# Altium PCB Optic_sensor_quad.PcbDoc
Units mm, origin at the board's own origin, x right, y up, seen from the top; angles counter-clockwise.
Board outline 50 x 12 mm, 2 copper layers (Top Layer, Bottom Layer), stack 0.871 mm thick; 29 components, 16 nets, 82 pads, 26 vias.
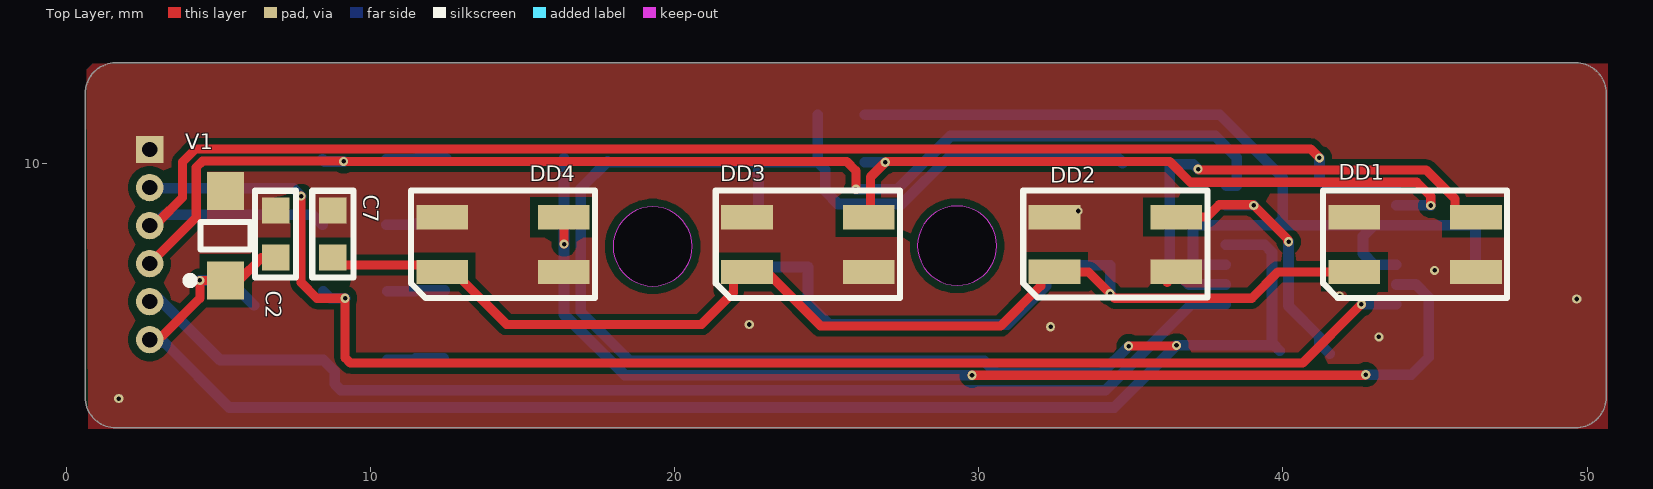
[diagram p0: Top Layer view]
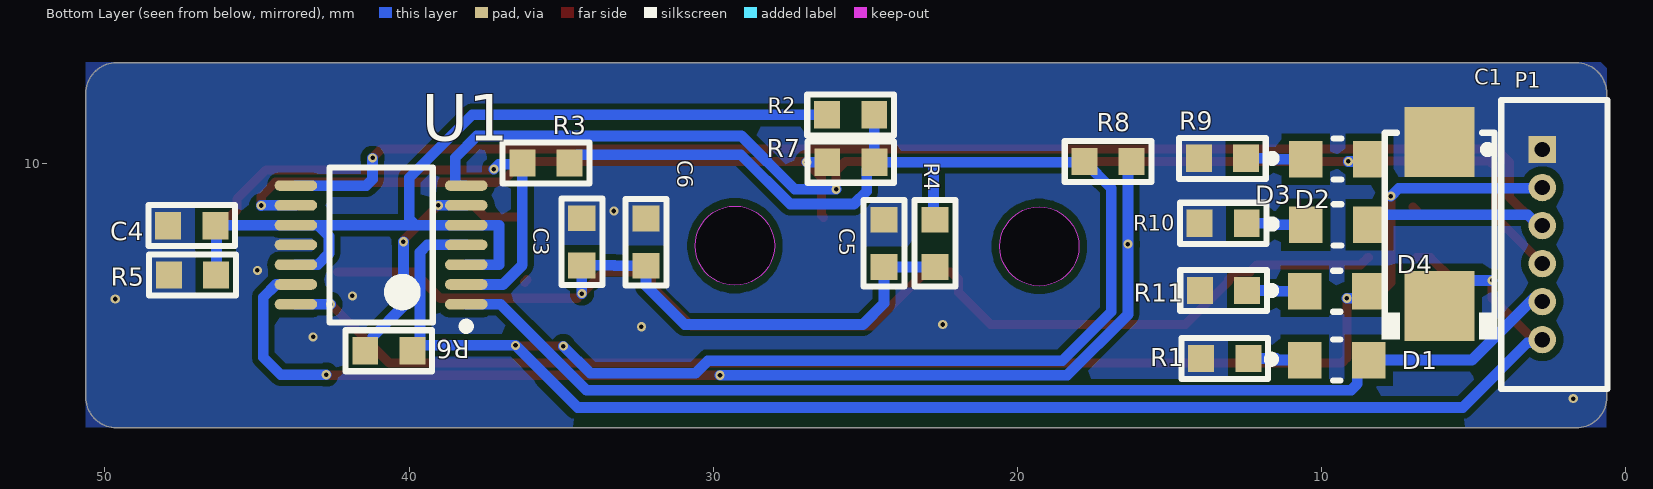
[diagram p1: Bottom Layer view, seen from below]
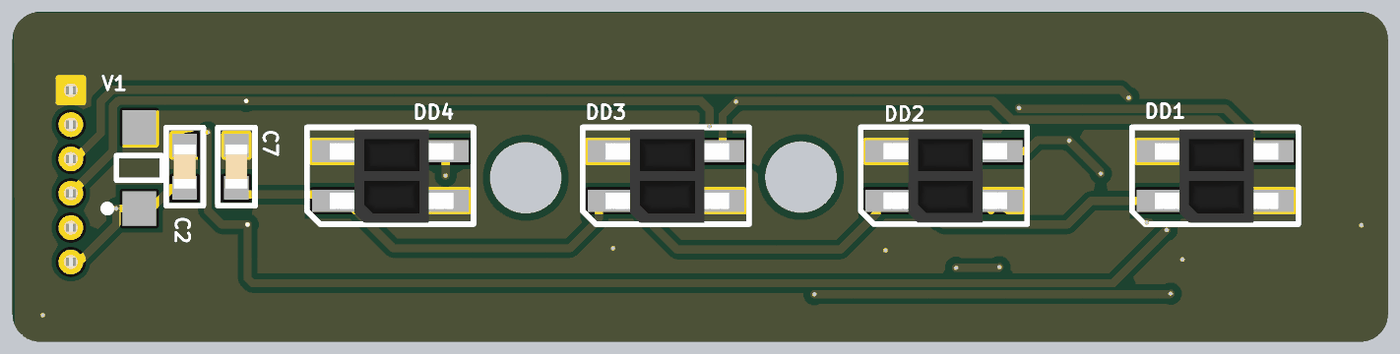
[diagram p2: 3D render of the assembled board from above, using the file's embedded part models]
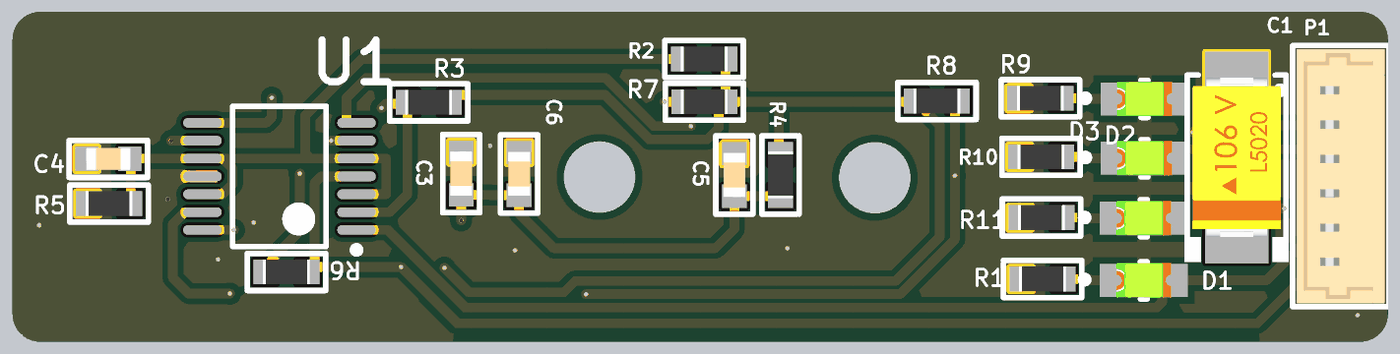
[diagram p3: 3D render of the assembled board from below, using the file's embedded part models]

## Layer stack, top to bottom
Top Solder: solder mask 0.0102, Solder Resist, Dk 3.5
Top Layer: signal copper 0.0356
Dielectric 1: dielectric 0.8, FR-4, Dk 4.8
Bottom Layer: signal copper 0.0356
Bottom Solder: solder mask 0.0102, Solder Resist, Dk 3.5

## Board outline
1.624,1.302 cw(c1.624,2.302) 0.624,2.302 0.624,12.302 cw(c1.624,12.302) 1.624,13.302 49.624,13.302 cw(c49.624,12.302) 50.624,12.302 50.624,2.302 cw(c49.624,2.302) 49.624,1.302
cut-out: 17.976,7.264 ccw(c19.279,7.264) 19.279,5.962 ccw(c19.279,7.264) 20.581,7.264 ccw(c19.279,7.264) 19.279,8.567 ccw(c19.279,7.264)
cut-out: 27.984,7.29 ccw(c29.286,7.29) 29.286,5.988 ccw(c29.286,7.29) 30.588,7.29 ccw(c29.286,7.29) 29.286,8.592 ccw(c29.286,7.29)

## Design rules (kind name [scope] priority, off if disabled: settings)
Clearance [All] p1: gap=0.254 ignorepadtopadclearanceinfootprint=TRUE except(0: Arc-Hole Track-Hole SMDPad-Hole THPad-Hole Via-Hole Fill-Hole Poly-Hole Region-Hole Text-Hole; 0.1: Arc-Arc Arc-Track Arc-Via Track-Track Track-Via SMDPad-SMDPad SMDPad-Via THPad-Via Via-Via; 0.2: Arc-SMDPad Arc-Fill Arc-Poly Arc-Region Track-SMDPad Track-Fill Track-Poly Track-Region)
Height [All] p1: minheight=0 maxheight=101.6 prefheight=12.7
PlaneConnect [All] p1: planeconnectstyle=Direct reliefexpansion=0.508 reliefentries=4 reliefconductorwidth=0.254 reliefairgap=0.254
PolygonConnect [All] p1: connectstyle=Direct reliefconductorwidth=0.254 reliefentries=4 polygonreliefangle="90 Angle" airgapwidth=0.254
RoutingVias [All] p1: holewidth=0.15 width=0.3 viastyle="Through Hole" minholewidth=0.1 minwidth=0.2 maxholewidth=0.711 maxwidth=1.27
SilkToSilkClearance [All] p1: silktosilkclearance=0.05
SilkToSolderMaskClearance [IsPad] p1: minsilkscreentomaskgap=0.05 clearancetoexposedcopper=TRUE
SolderMaskExpansion [All] p1: expansion=0.102 istentingtop=FALSE
SupplyNets "Schematic Supply Nets_1" [InNet('+5')] p1: voltage=0.000
SupplyNets "Schematic Supply Nets" [InNet('GND')] p2: voltage=0.000
Width [All] p1: maxlimit=3 minlimit=0.28 preferedwidth=0.35 toplayer_prefwidth=0.3 minimp=50.000000 maximp=50.000000 favimp=50.000000
26 further rules are at their usual default settings.

## Components (designator, comment, footprint, x,y, rotation, side; value= is the part's Value field where it differs from the comment)
C1 "25 uF" CAP-TAN-C 6.121,8.001 r90 bottom
C2 "0.1uF" CAP-0603 6.883,7.671 r270 top
C3 "0.1uF" CAP-0603 34.315,7.417 r270 bottom
C4 "0.1uF" CAP-0603 47.142,7.95 r180 bottom
C5 "0.1uF" CAP-0603 24.384,7.366 r270 bottom
C6 "0.1uF" CAP-0603 32.207,7.404 r270 bottom
C7 "0.1uF" CAP-0603 8.763,7.671 r270 top
D1 "151031YS06000" LED_GREEN 9.5,3.531 r180 bottom
D2 "151031YS06000" LED_GREEN 9.474,10.135 r180 bottom
D3 "151031YS06000" LED_GREEN 9.474,7.976 r180 bottom
D4 "151031YS06000" LED_GREEN 9.5,5.791 r180 bottom
DD1 "QRE1113" QRE1113 44.342,7.326 r0 top
DD2 "QRE1113" QRE1113 34.487,7.33 r0 top
DD3 "QRE1113" QRE1113 24.377,7.326 r0 top
DD4 "QRE1113" QRE1113 14.358,7.326 r0 top
P1 "653006114822" 653006114822 2.343,7.325 r90 bottom
R1 "680" RES-0603 13.183,3.581 r180 bottom
R2 "100" RES-0603 25.482,11.59 r180 bottom
R3 "100K" RES-0603 35.497,10.008 r180 bottom
R4 "1K" RES-0603 22.708,7.366 r270 bottom
R5 "1K" RES-0603 47.117,6.325 r180 bottom
R6 "100K" RES-0603 40.665,3.835 r180 bottom
R7 "100K" RES-0603 25.476,10.033 r180 bottom
R8 "100K" RES-0603 17.018,10.058 r0 bottom
R9 "680" RES-0603 13.259,10.16 r180 bottom
R10 "680" RES-0603 13.233,8.026 r180 bottom
R11 "680" RES-0603 13.221,5.817 r180 bottom
U1 "MCP6004" TSSOP-ST14_L 40.919,7.315 r0 bottom
V1 "SMF5.0A" SOD-123 5.232,7.62 r90 top

## Footprints (in the part's own frame and the unit in brackets; to place one, negate y for a bottom-side part, rotate by r counter-clockwise, add the part's x,y. Pads: shape width x height; smd on the part's side, far side on the other; paste and mask are expansions set on the pad)
653006114822 [mm] "1.25mm Male Vertical Shrouded Header, 6p"
  rect 0.9x0.9 hole 0.5: 1(3.125,0.4)
  round 0.9 hole 0.5: 2(1.875,0.4) 3(0.625,0.4) 4(-0.625,0.4) 5(-1.875,0.4) 6(-3.125,0.4)
  silkscreen extent -4.75,-1.75 4.75,2.32, body extent -4.63,-1.6 4.62,1.6, height 4.23
CAP-0603 [mm]
  rect 0.85x0.9 smd: 1(-0.775,0) 2(0.775,0)
  silkscreen extent -1.42,-0.68 1.42,0.68, body extent -0.8,-0.4 0.8,0.4, height 0.8
CAP-TAN-C [mm]
  rect 2.3x2.3 smd: 1(-2.7,0) 2(2.7,0)
  silkscreen extent -3.8,-1.9 3,1.9, body extent -2.9,-1.6 2.9,1.6, height 2.6
LED_GREEN [mm]
  rect 1.1x1.2 smd paste+0 mask+0: 1(1.05,0) 2(-1.05,0)
  silkscreen extent -2.28,-0.67 0.12,0.67, body extent -1,-0.63 1,0.63, height 0.8
QRE1113 [mm]
  rect 1.7x0.8 smd: 1(-2,-0.9) 2(2,-0.9) 3(2,0.9) 4(-2,0.9)
  silkscreen extent -3.02,-1.75 3.03,1.78, body extent -2.2,-1.7 2.3,1.7, height 1.55
RES-0603 [mm]
  rect 0.85x0.9 smd: 1(-0.775,0) 2(0.775,0)
  silkscreen extent -1.43,-0.67 1.43,0.67, body extent -0.85,-0.45 0.85,0.45, height 0.55
SOD-123 [mm] "SOD-123"
  rect 1.25x1.22 smd: 1(-1.475,0) 2(1.475,0)
  silkscreen extent -1.6,-0.83 0.45,1.28, body extent -1.35,-0.82 1.35,0.82, height 0.98
TSSOP-ST14_L [mm] "TSOP, 14-Leads, Body 5x4.4mm, Pitch 0.65mm, IPC High Density"
  oval 1.4x0.35 smd: 1(-2.8,1.95) 2(-2.8,1.3) 3(-2.8,0.65) 4(-2.8,0) 5(-2.8,-0.65) 6(-2.8,-1.3) 7(-2.8,-1.95) 8(2.8,-1.95) 9(2.8,-1.3) 10(2.8,-0.65) 11(2.8,0) 12(2.8,0.65) 13(2.8,1.3) 14(2.8,1.95)
  silkscreen extent -2.92,-2.55 1.7,2.8, body extent -2.25,-2.55 2.25,2.55, height 1.2

## Part data
C1: library part CAP-POLAR
C2 C3 C4 C5 C6 C7: library part CAP-NON-POLAR
D1 D2 D3 D4: library part LED, "WURTH ELEKTRONIK - 151031YS06000 - LED, Yellow, Through Hole, T-1 (3mm), 30 mA, 2 V, 590 nm", Manufacturer_Name="Wurth Elektronik", Mouser Part Number=710-151031YS06000, Datasheet Link=https://katalog.we-online.de/led/datasheet/151031YS06000.pdf, Geometry.Height=5.5mm, Manufacturer_Part_Number=151031YS06000, Mouser Price/Stock=https://www.mouser.co.uk/ProductDetail/Wurth-Elektronik/151031YS06000?qs=LlUlMxKIyB3xSYYW%252BcuBiQ%3D%3D
P1: "WR-WTB THT Male Vertical Shrouded Header, pitch 1.25mm, 6p", Contact Resistance=20mOhm, Operating Temperature="-40 to +85degC", Rated Current=1A, Withstanding Voltage=250VAC, Working Voltage=125VAC, ComponentLink1Description=Manufacturer, ComponentLink1URL=http://www.we-online.de, ComponentLink2Description=Datasheet, ComponentLink2URL=https://www.we-online.com/catalog/datasheet/653006114822.pdf, Gender=Male, Mounting Technology=THT, Packaging=Tube, Part Number=653006114822, Pin Number=6, Pitch=1.25mm, Published Date="January 2020", Publisher="Wurth Elektronik", Type=Vertical
R1 R2 R3 R4 R5 R6 R7 R8 R9 R10 R11: library part RES-CONST
U1: "MCP6004 TSSOP"
V1: "SMF5.0A SOD-123"

## Via types
v1: diameter 0.3, hole 0.15, Top Layer to Bottom Layer, tented both sides, 26 vias

## Nets (pads, with @x,y where several pads share a name; then routed paths per layer and width w, separated by ;. In a path a pad name is that pad's centre, name@x,y a point inside that pad or via, vN(x,y) a via of type N, cw(c..) or ccw(c..) an arc to the next point about the centre after c; other vN are vias at no path point)
+5: C1.1 C2.2 P1.6 R2.2 R3.2 R4.1 R6.2 R7.2 R8.2 U1.4 V1.1 | length 100.1
  Top Layer w0.3: P1.6 2.858,4.315 3.147,4.315 4.394,5.563 v1@4.394,6.145 ; v1(4.394,6.147) 4.844,6.147 5.231,6.147 V1.1 ; V1.1@4.844,6.145 V1.1 ; C2.2 6.423,6.896 5.672,6.145 V1.1 ; v1(34.925,3.988) 36.474,3.988 v1(36.5,4.013)
  Bottom Layer w0.35: P1.6 2.848,4.095 3.238,4.095 5.364,1.97 34.456,1.97 v1(36.5,4.013) 39.64,4.013 R6.2@39.64,4.039 ; v1(4.394,6.147) 5.352,6.147 C1.1@6.172,5.326 ; R8.2@17.777,10.033 22.758,10.033 ; R8.2 16.916,9.182 16.916,5.115 18.524,3.507 30.173,3.507 30.582,3.099 34.036,3.099 v1(34.925,3.988) ; R4.1@22.758,8.141 22.758,10.033 ; R2.2 24.707,10.801 24.701,10.795 R7.2 ; R3.2 34.722,10.033 34.472,10.283 29.093,10.283 27.472,8.661 25.373,8.661 24.951,9.083 24.951,9.783 R7.2 ; U1.4 39.395,7.315 39.64,7.07 R6.2@39.64,4.039 ; R6.2 39.687,4.039 R6.2@39.64,4.039 ; 22.758,10.033 R7.2
GND: C1.2 C2.1 C3.1 C4.1 C5.1 C6.1 C7.1 DD1.2 DD1.4 DD2.2 DD2.4 DD3.2 DD3.4 DD4.2 DD4.4 P1.1 R1.1 R5.1 R9.1 R10.1 R11.1 U1.11 V1.2 | length 0.3
  Top Layer w0.3: C2.1 C2.1@6.997,8.56 ; DD2.2@36.119,6.171 36.119,6.164 DD2.2@36.194,6.089
  other v1: 1.727,2.261 43.155,4.293 32.36,4.623 22.454,4.699 49.657,5.537 41.859,5.639 44.983,6.477 33.263,8.43
NetC3_2: C3.2 C5.2 C6.2 C7.2 DD1.1 DD2.1 DD3.1 DD4.1 R4.2 | length 53.5
  Top Layer w0.3: C7.2@8.458,6.896 8.483,6.896 8.724,6.655 12.129,6.655 DD4.1 ; DD4.1@12.352,6.426 12.808,6.426 13.058,6.176 13.058,6.117 14.475,4.699 20.879,4.699 21.932,5.752 21.932,6.176 22.182,6.426 23.02,6.426 24.798,4.648 30.717,4.648 32.037,5.969 32.037,6.43 DD2.1 32.497,6.42 33.611,6.42 v1(34.315,5.715) 34.468,5.563 38.972,5.563 39.835,6.426 DD1.1
  Bottom Layer w0.35: R4.2 C5.2 24.384,5.393 25.078,4.699 30.937,4.699 32.207,5.969 C6.2 33.231,6.629 33.244,6.642 C3.2 v1(34.315,5.715)
NetC4_2: C4.2 R2.1 R5.2 U1.3 U1.5 U1.10 U1.12 | length 31.9
  Bottom Layer w0.35: R2.1 37.923,11.59 39.99,9.523 39.99,8.17 39.785,7.965 37.041,7.965 37.041,6.665 U1.3 ; 39.525,7.965 42.998,7.965 ; U1.12 42.998,6.665 42.629,7.034 42.629,7.597 42.998,7.965 ; R5.2@46.33,6.506 46.33,7.965 U1.10 42.998,7.965
NetD1_1: D1.1 P1.5 U1.1 | length 37.8
  Bottom Layer w0.35: P1.5@3.016,5.567 5.053,3.531 D1.1 8.825,3.156 8.825,2.745 9.03,2.54 34.165,2.54 36.99,5.365 U1.1
NetD1_2: D1.2 R1.2 | length 1.9
  Bottom Layer w0.35: D1.2 11.438,3.531 11.489,3.581 R1.2
NetD2_1: D2.1 P1.4 U1.7 | length 41.8
  Top Layer w0.3: P1.4 4.272,8.229 4.272,9.865 4.477,10.07 9.107,10.07 v1(9.119,10.058) 25.654,10.058 25.959,9.754 v1(25.959,9.144)
  Bottom Layer w0.35: D2.1 8.5,10.058 v1(9.119,10.058) ; v1(25.959,9.144) 27.318,9.144 29.071,10.897 37.768,10.897 38.481,10.184 38.481,9.265 U1.7@38.144,9.265
NetD2_2: D2.2 R9.2 | length 2
  Bottom Layer w0.35: D2.2 11.489,10.135 11.514,10.16 R9.2
NetD3_1: D3.1 P1.3 U1.8 | length 49.2
  Top Layer w0.3: P1.3@3.016,8.067 3.827,8.878 3.827,10.045 4.253,10.47 40.905,10.47 v1(41.199,10.176)
  Bottom Layer w0.35: P1.3 2.868,7.95 3.223,8.306 8.094,8.306 D3.1 ; v1@41.199,10.16 41.199,9.47 41.404,9.265 U1.8
NetD3_2: D3.2 R10.2 | length 2
  Bottom Layer w0.35: D3.2 11.463,7.976 11.514,8.026 R10.2
NetD4_1: D4.1 P1.2 U1.14 | length 47.9
  Top Layer w0.3: P1.2@2.677,9.134 P1.2 ; v1(7.72,8.917) 7.72,6.081 8.238,5.563 v1(9.169,5.563) 9.169,3.605 9.345,3.429 40.642,3.429 v1(42.578,5.365)
  Bottom Layer w0.35: P1.2 2.767,9.176 7.461,9.176 v1(7.72,8.917) ; D4.1 8.678,5.563 v1(9.169,5.563) ; v1(42.578,5.365) U1.14
NetD4_2: D4.2 R11.2 | length 1.9
  Bottom Layer w0.35: D4.2 11.463,5.791 11.489,5.817 R11.2
NetDD1_3: DD1.3 R3.1 U1.2 | length 16.5
  Top Layer w0.3: v1(37.211,9.804) 37.239,9.776 44.707,9.776 45.656,8.827 45.656,8.476 45.906,8.226 DD1.3
  Bottom Layer w0.35: v1(37.211,9.804) 37.052,9.963 36.316,9.963 R3.1 36.272,6.655 36.911,6.015 U1.2
NetDD2_3: DD2.3 R6.1 U1.6 | length 9.5
  Top Layer w0.3: DD2.3 37.498,8.23 37.905,8.636 v1@39.017,8.636 ; v1(39.037,8.615) 40.157,7.495 40.157,7.442 v1(40.183,7.417)
  Bottom Layer w0.35: U1.6 v1(39.037,8.615) ; v1(40.183,7.417) 40.183,5.309 41.19,4.301 41.19,4.085 R6.1@41.542,3.734
NetDD3_3: DD3.3 R7.1 U1.9 | length 22.6
  Top Layer w0.3: DD3.3 26.438,8.287 26.438,9.547 26.949,10.058 36.271,10.058 36.953,9.376 44.396,9.376 44.856,8.915 v1(44.856,8.611)
  Bottom Layer w0.35: R7.1 v1(26.924,10.033) ; U1.9 44.852,8.615 v1(44.856,8.611)
NetDD4_3: DD4.3 R8.1 U1.13 | length 38.7
  Top Layer w0.3: DD4.3 16.366,8.226 v1(16.366,7.341) ; v1(29.777,3.029) 42.704,3.029 v1(42.723,3.048)
  Bottom Layer w0.35: R8.1@16.366,10.156 v1(16.366,7.341) 16.366,5.029 18.366,3.029 v1(29.777,3.029) ; v1(42.723,3.048) 44.218,3.048 44.794,3.624 44.794,5.593 44.372,6.015 U1.13

## Polygon pours and split planes (outlines as drawn)
GND on Bottom Layer "GND_L02_P000" (solid, pour order 0): 0.623,13.318 50.634,13.318 50.634,1.318 0.644,1.318
GND on Top Layer "GND_L01_P001" (solid, remove dead copper, pour order 1): 0.671,13.279 50.675,13.279 50.675,1.279 0.715,1.279

## Silkscreen, mask and mechanical layers (free items; w line width, h text height)
Mechanical 1:
  drawing of 291 lines, arcs and shapes, not listed
Top Assembly:
  lines w0.013: -0.5,-0.009 -0.5,54.991 59.5,54.991 59.5,-0.009 -0.5,-0.009